# Altium PCB nrf24l01_cell(P40).PcbDoc (part 5 of 11)
Units mm, origin at the board's own origin, x right, y up, seen from the top; angles counter-clockwise.
Board outline 136.2 x 112.2 mm, 2 copper layers (TopLayer, BottomLayer); 520 components, 0 nets, 2804 pads, 1040 vias.
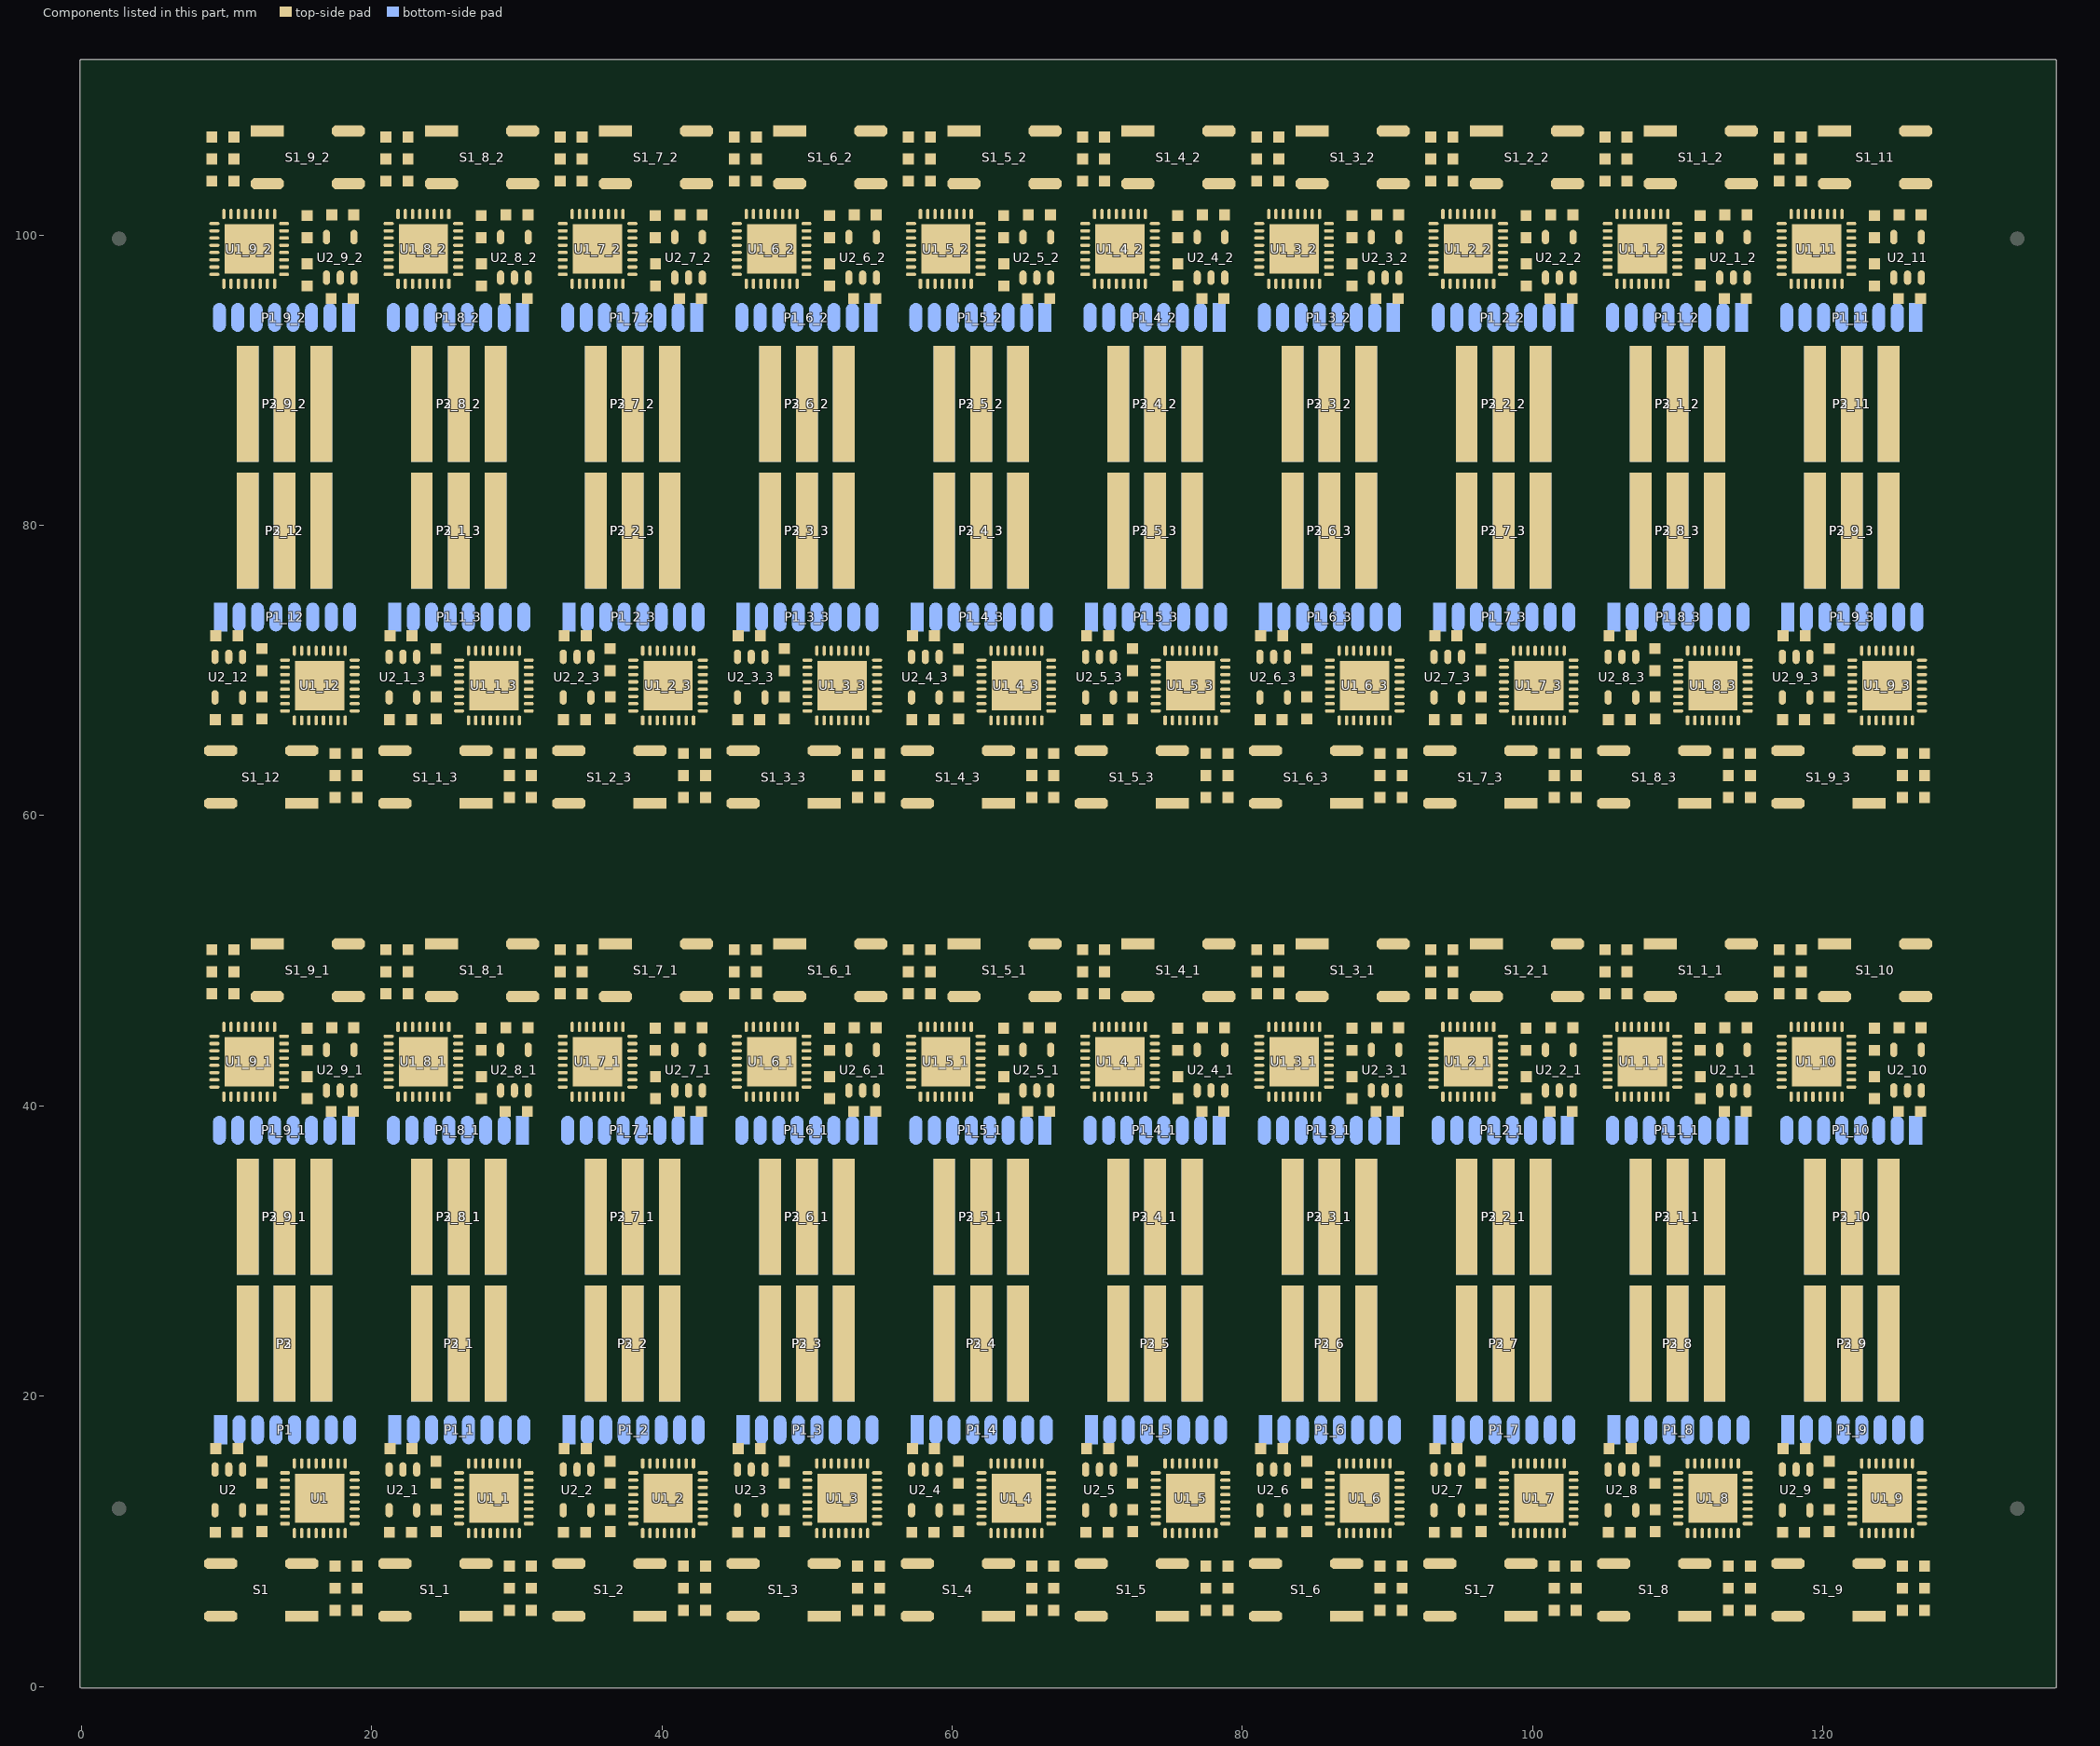
[diagram p5: the components of this part, seen from the top]

## Via types
v1: diameter 0.4, hole 0.2, TopLayer to BottomLayer, tented both sides, 1040 vias

## Nets (pads, with @x,y where several pads share a name; then routed paths per layer and width w, separated by ;. In a path a pad name is that pad's centre, name@x,y a point inside that pad or via, vN(x,y) a via of type N, cw(c..) or ccw(c..) an arc to the next point about the centre after c; other vN are vias at no path point) (continued)
copper on no net: (continued)
  TopLayer w0.203: v1@74.68,97.99 cw(c74.512,97.822) 74.75,97.822 cw(c74.988,97.822) v1@74.82,97.99 ; v1(74.69,17.52) 75.16,17.52 75.665,17.015 76.68,16 76.68,15.36 ; v1(74.69,73.52) 75.16,73.52 75.665,73.015 76.68,72 76.68,71.36 ; v1@74.74,43.51 74.74,44.41 74.89,44.56 76.89,44.56 ; 74.74,43.723 ccw(c74.943,43.723) v1@74.8,43.58 ; v1@74.74,99.51 74.74,100.41 74.89,100.56 76.89,100.56 ; 74.74,99.723 ccw(c74.943,99.723) v1@74.8,99.58 ; v1@74.76,17.45 cw(c74.928,17.282) 74.928,17.52 cw(c74.928,17.758) v1@74.76,17.59 ; v1@74.76,73.45 cw(c74.928,73.282) 74.928,73.52 cw(c74.928,73.758) v1@74.76,73.59 ; 74.864,36.675 cw(c74.864,36.284) v1@75.14,36.56 ; 74.864,92.675 cw(c74.864,92.284) v1@75.14,92.56 ; 74.912,39.942 cw(c75.56,39.295) 75.56,40.211 ; 74.912,95.942 cw(c75.56,95.295) 75.56,96.211 ; 75.029,15.927 cw(c74.698,15.595) 75.167,15.595 ; 75.029,71.927 cw(c74.698,71.595) 75.167,71.595 ; 75.154,40.184 ccw(c74.847,40.49) 75.281,40.49 ; 75.154,96.184 ccw(c74.847,96.49) 75.281,96.49 ; 75.356,43.619 cw(c74.91,43.16) 75.55,43.16 ; 75.356,99.619 cw(c74.91,99.16) 75.55,99.16 ; 75.379,8.28 77.486,8.28 ; 75.379,64.28 77.486,64.28 ; 75.55,43.82 75.55,43.16 ; 75.55,99.82 75.55,99.16 ; 75.744,43.619 ccw(c76.19,43.16) 75.55,43.16 ; 75.744,99.619 ccw(c76.19,99.16) 75.55,99.16 ; v1@75.81,37.29 ccw(c75.642,37.122) 75.642,37.36 ccw(c75.642,37.598) v1@75.81,37.43 ; v1@75.81,93.29 ccw(c75.642,93.122) 75.642,93.36 ccw(c75.642,93.598) v1@75.81,93.43 ; v1(75.88,37.36) v1@75.81,37.36 ; v1(75.88,93.36) v1@75.81,93.36 ; v1@75.89,37.28 v1@75.81,37.36 ; v1@75.89,93.28 v1@75.81,93.36 ; v1@75.95,17.422 cw(c75.95,17.184) 76.118,17.352 cw(c76.286,17.52) v1@76.048,17.52 ; v1(75.95,17.52) 77.18,16.29 77.18,15.36 ; v1@75.95,73.422 cw(c75.95,73.184) 76.118,73.352 cw(c76.286,73.52) v1@76.048,73.52 ; v1(75.95,73.52) 77.18,72.29 77.18,71.36 ; 76.006,8.523 ccw(c76.593,9.111) 76.593,8.28 ; 76.006,64.523 ccw(c76.593,65.111) 76.593,64.28 ; 76.15,8.667 ccw(c77.084,9.602) 77.084,8.28 ; 76.15,64.667 ccw(c77.084,65.602) 77.084,64.28 ; 76.54,19.732 cw(c76.54,18.673) 77.288,19.422 ; 76.54,20.17 78.79,17.92 v1(79.45,17.92) ; 76.54,35.3 v1(79.31,38.07) ; 76.54,35.862 ccw(c76.54,37.219) 77.499,36.259 ; 76.54,36.065 ccw(c76.54,37.913) 77.846,36.606 ; 76.54,36.268 ccw(c76.54,38.606) 78.193,36.953 ; v1(76.54,36.86) 77.344,36.86 77.422,36.938 78.734,38.25 78.734,39.62 78.734,41.004 78.79,41.06 78.79,41.84 78.6,42.03 77.06,42.03 76.89,41.86 76.89,41.06 ; 76.54,75.732 cw(c76.54,74.673) 77.288,75.422 ; 76.54,76.17 78.79,73.92 v1(79.45,73.92) ; 76.54,91.3 v1(79.31,94.07) ; 76.54,91.862 ccw(c76.54,93.219) 77.499,92.259 ; 76.54,92.065 ccw(c76.54,93.913) 77.846,92.606 ; 76.54,92.268 ccw(c76.54,94.606) 78.193,92.953 ; v1(76.54,92.86) 77.344,92.86 77.422,92.938 78.734,94.25 78.734,95.62 78.734,97.004 78.79,97.06 78.79,97.84 78.6,98.03 77.06,98.03 76.89,97.86 76.89,97.06 ; v1@76.61,36.79 cw(c76.778,36.622) 76.778,36.86 cw(c76.778,37.098) v1@76.61,36.93 ; v1@76.61,92.79 cw(c76.778,92.622) 76.778,92.86 cw(c76.778,93.098) v1@76.61,92.93 ; 76.782,20.38 ccw(c77.873,20.38) 77.102,19.608 ; 76.782,76.38 ccw(c77.873,76.38) 77.102,75.608 ; 76.785,41.415 ccw(c76.532,41.668) 76.89,41.668 ccw(c77.248,41.668) 76.995,41.415 ; 76.785,44.215 ccw(c76.532,44.468) 76.89,44.468 ccw(c77.248,44.468) 76.995,44.215 ; 76.785,97.415 ccw(c76.532,97.668) 76.89,97.668 ccw(c77.248,97.668) 76.995,97.415 ; 76.785,100.215 ccw(c76.532,100.468) 76.89,100.468 ccw(c77.248,100.468) 76.995,100.215 ; 76.89,43.86 76.89,44.56 ; 76.89,44.484 cw(c77.557,44.484) 77.341,45.116 ; 76.89,44.769 cw(c77.46,44.769) 77.275,45.308 ; 76.89,45.054 cw(c77.362,45.054) 77.209,45.5 ; 76.89,99.86 76.89,100.56 ; 76.89,100.484 cw(c77.557,100.484) 77.341,101.116 ; 76.89,100.769 cw(c77.46,100.769) 77.275,101.308 ; 76.89,101.054 cw(c77.362,101.054) 77.209,101.5 ; 76.985,20.38 ccw(c78.567,20.38) 77.448,19.262 ; 76.985,76.38 ccw(c78.567,76.38) 77.448,75.262 ; v1@77.042,37.37 ccw(c76.804,37.37) 76.972,37.538 ccw(c77.14,37.706) v1@77.14,37.468 ; v1@77.042,93.37 ccw(c76.804,93.37) 76.972,93.538 ccw(c77.14,93.706) v1@77.14,93.468 ; 77.188,20.38 ccw(c79.261,20.38) 77.795,18.915 ; 77.188,35.62 cw(c77.981,35.62) 77.421,36.181 ; 77.188,76.38 ccw(c79.261,76.38) 77.795,74.915 ; 77.188,91.62 cw(c77.981,91.62) 77.421,92.181 ; 77.25,45.38 76.89,45.02 76.89,44.56 ; 77.25,101.38 76.89,101.02 76.89,100.56 ; 77.288,8.082 ccw(c76.811,7.605) 76.811,8.28 ccw(c76.811,8.955) 77.288,8.478 ; 77.288,64.082 ccw(c76.811,63.605) 76.811,64.28 ccw(c76.811,64.955) 77.288,64.478 ; 77.49,6.76 78.21,7.48 78.21,9.16 77.68,9.69 77.68,10.56 ; 77.49,7.039 ccw(c77.49,7.714) 77.967,7.237 ccw(c78.444,6.76) 77.769,6.76 ; 77.49,62.76 78.21,63.48 78.21,65.16 77.68,65.69 77.68,66.56 ; 77.49,63.039 ccw(c77.49,63.714) 77.967,63.237 ccw(c78.444,62.76) 77.769,62.76 ; 78.18,15.36 78.18,16.579 76.311,18.447 72.91,18.447 72.717,18.64 v1@72.19,18.64 ; 78.18,71.36 78.18,72.579 76.311,74.447 72.91,74.447 72.717,74.64 v1@72.19,74.64 ; 78.536,39.422 cw(c78.059,38.945) 78.734,38.945 cw(c79.409,38.945) 78.932,39.422 ; 78.536,39.818 ccw(c78.059,40.295) 78.734,40.295 ccw(c79.409,40.295) 78.932,39.818 ; 78.536,95.422 cw(c78.059,94.945) 78.734,94.945 cw(c79.409,94.945) 78.932,95.422 ; 78.536,95.818 ccw(c78.059,96.295) 78.734,96.295 ccw(c79.409,96.295) 78.932,95.818 ; 78.685,41.415 ccw(c78.432,41.668) 78.79,41.668 ccw(c79.148,41.668) 78.895,41.415 ; 78.685,97.415 ccw(c78.432,97.668) 78.79,97.668 ccw(c79.148,97.668) 78.895,97.415 ; 78.734,40.317 cw(c79.283,40.317) 78.895,40.705 ; 78.734,96.317 cw(c79.283,96.317) 78.895,96.705 ; 78.812,8.478 ccw(c78.335,8.955) 79.01,8.955 ccw(c79.685,8.955) 79.208,8.478 ; 78.812,64.478 ccw(c78.335,64.955) 79.01,64.955 ccw(c79.685,64.955) 79.208,64.478 ; 78.83,11.21 78.83,10.52 79.01,10.34 79.01,8.28 ; 78.83,12.21 v1(79.45,12.21) v1@79.52,12.21 ; 78.83,67.21 78.83,66.52 79.01,66.34 79.01,64.28 ; 78.83,68.21 v1(79.45,68.21) v1@79.52,68.21 ; v1@78.92,9.72 cw(c78.704,9.504) 79.01,9.504 ; v1@78.92,9.86 ccw(c78.704,10.076) 79.01,10.076 ; v1@78.92,65.72 cw(c78.704,65.504) 79.01,65.504 ; v1@78.92,65.86 ccw(c78.704,66.076) 79.01,66.076 ; v1@79.212,38.07 cw(c78.974,38.07) 79.142,37.902 cw(c79.31,37.734) v1@79.31,37.972 ; v1@79.212,94.07 cw(c78.974,94.07) 79.142,93.902 cw(c79.31,93.734) v1@79.31,93.972 ; v1@79.38,12.14 ccw(c79.212,11.972) 79.212,12.21 ccw(c79.212,12.448) v1@79.38,12.28 ; v1@79.38,17.85 ccw(c79.212,17.682) 79.212,17.92 ccw(c79.212,18.158) v1@79.38,17.99 ; v1@79.38,68.14 ccw(c79.212,67.972) 79.212,68.21 ccw(c79.212,68.448) v1@79.38,68.28 ; v1@79.38,73.85 ccw(c79.212,73.682) 79.212,73.92 ccw(c79.212,74.158) v1@79.38,73.99 ; v1@80.48,43.79 v1(80.55,43.79) 81.17,43.79 ; v1@80.48,99.79 v1(80.55,99.79) 81.17,99.79 ; v1(80.55,38.08) 81.21,38.08 83.46,35.83 ; v1(80.55,94.08) 81.21,94.08 83.46,91.83 ; v1@80.62,38.01 cw(c80.788,37.842) 80.788,38.08 cw(c80.788,38.318) v1@80.62,38.15 ; v1@80.62,43.72 cw(c80.788,43.552) 80.788,43.79 cw(c80.788,44.028) v1@80.62,43.86 ; v1@80.62,94.01 cw(c80.788,93.842) 80.788,94.08 cw(c80.788,94.318) v1@80.62,94.15 ; v1@80.62,99.72 cw(c80.788,99.552) 80.788,99.79 cw(c80.788,100.028) v1@80.62,99.86 ; v1(80.69,17.93) 83.46,20.7 ; v1@80.69,18.028 ccw(c80.69,18.266) 80.858,18.098 ccw(c81.026,17.93) v1@80.788,17.93 ; v1(80.69,73.93) 83.46,76.7 ; v1@80.69,74.028 ccw(c80.69,74.266) 80.858,74.098 ccw(c81.026,73.93) v1@80.788,73.93 ; 80.792,47.522 cw(c80.315,47.045) 80.99,47.045 cw(c81.665,47.045) 81.188,47.522 ; 80.792,103.522 cw(c80.315,103.045) 80.99,103.045 cw(c81.665,103.045) 81.188,103.522 ; 80.99,45.924 cw(c81.296,45.924) v1@81.08,46.14 ; 80.99,46.496 ccw(c81.296,46.496) v1@81.08,46.28 ; 80.99,47.72 80.99,45.66 81.17,45.48 81.17,44.79 ; 80.99,101.924 cw(c81.296,101.924) v1@81.08,102.14 ; 80.99,102.496 ccw(c81.296,102.496) v1@81.08,102.28 ; 80.99,103.72 80.99,101.66 81.17,101.48 81.17,100.79 ; 81.068,16.182 cw(c80.591,15.705) 81.266,15.705 cw(c81.941,15.705) 81.464,16.182 ; 81.068,16.578 ccw(c80.591,17.055) 81.266,17.055 ccw(c81.941,17.055) 81.464,16.578 ; 81.068,72.182 cw(c80.591,71.705) 81.266,71.705 cw(c81.941,71.705) 81.464,72.182 ; 81.068,72.578 ccw(c80.591,73.055) 81.266,73.055 ccw(c81.941,73.055) 81.464,72.578 ; 81.105,14.585 cw(c80.852,14.332) 81.21,14.332 cw(c81.568,14.332) 81.315,14.585 ; 81.105,15.295 ccw(c80.717,15.683) 81.266,15.683 ; 81.105,70.585 cw(c80.852,70.332) 81.21,70.332 cw(c81.568,70.332) 81.315,70.585 ; 81.105,71.295 ccw(c80.717,71.683) 81.266,71.683 ; 81.17,41.29 81.17,39.497 83.52,37.146 84.488,37.146 84.96,36.675 87.165,36.675 v1(87.21,36.63) ; 81.17,41.79 80.69,41.79 80.48,41.58 80.48,39.612 83.352,36.74 84.32,36.74 86,35.06 86,32.37 ; 81.17,97.29 81.17,95.497 83.52,93.146 84.488,93.146 84.96,92.675 87.165,92.675 v1(87.21,92.63) ; 81.17,97.79 80.69,97.79 80.48,97.58 80.48,95.612 83.352,92.74 84.32,92.74 86,91.06 86,88.37 ; 81.807,19.047 cw(c83.46,17.394) 83.46,19.732 ; 81.807,75.047 cw(c83.46,73.394) 83.46,75.732 ; 81.82,40.64 81.82,39.421 83.689,37.553 87.09,37.553 87.283,37.36 v1@87.81,37.36 ; 81.82,96.64 81.82,95.421 83.689,93.553 87.09,93.553 87.283,93.36 v1@87.81,93.36 ; 82.154,19.394 cw(c83.46,18.087) 83.46,19.935 ; 82.154,75.394 cw(c83.46,74.087) 83.46,75.935 ; 82.205,37.085 cw(c80.739,35.62) 82.812,35.62 ; 82.205,93.085 cw(c80.739,91.62) 82.812,91.62 ; 82.231,49.24 cw(c81.556,49.24) 82.033,48.763 cw(c82.51,48.286) 82.51,48.961 ; 82.231,105.24 cw(c81.556,105.24) 82.033,104.763 cw(c82.51,104.286) 82.51,104.961 ; 82.32,40.64 82.32,39.496 83.841,37.975 85.995,37.975 86.08,38.06 v1(86.57,38.06) ; 82.32,45.44 82.32,46.31 81.79,46.84 81.79,48.52 82.51,49.24 ; 82.32,96.64 82.32,95.496 83.841,93.975 85.995,93.975 86.08,94.06 v1(86.57,94.06) ; 82.32,101.44 82.32,102.31 81.79,102.84 81.79,104.52 82.51,105.24 ; 82.501,19.741 cw(c83.46,18.781) 83.46,20.138 ; 82.501,75.741 cw(c83.46,74.781) 83.46,76.138 ; 82.514,47.72 84.62,47.72 ; 82.514,103.72 84.62,103.72 ; 82.552,36.738 cw(c81.433,35.62) 83.015,35.62 ; 82.552,92.738 cw(c81.433,91.62) 83.015,91.62 ; 82.579,19.819 ccw(c82.019,20.38) 82.812,20.38 ; 82.579,75.819 ccw(c82.019,76.38) 82.812,76.38 ; 82.659,10.884 ccw(c82.443,11.516) 83.11,11.516 ; 82.659,66.884 ccw(c82.443,67.516) 83.11,67.516 ; 82.712,36.578 ccw(c83.46,37.327) 83.46,36.268 ; 82.712,47.522 cw(c83.189,47.045) 83.189,47.72 cw(c83.189,48.395) 82.712,47.918 ; 82.712,92.578 ccw(c83.46,93.327) 83.46,92.268 ; 82.712,103.522 cw(c83.189,103.045) 83.189,103.72 cw(c83.189,104.395) 82.712,103.918 ; 82.725,10.692 ccw(c82.54,11.231) 83.11,11.231 ; 82.725,66.692 ccw(c82.54,67.231) 83.11,67.231 ; 82.75,10.62 83.11,10.98 83.11,11.44 ; 82.75,66.62 83.11,66.98 83.11,67.44 ; 82.791,10.5 ccw(c82.638,10.946) 83.11,10.946 ; 82.791,66.5 ccw(c82.638,66.946) 83.11,66.946 ; 82.82,40.64 82.82,39.71 v1(84.05,38.48) ; 82.82,96.64 82.82,95.71 v1(84.05,94.48) ; v1@82.86,18.532 cw(c82.86,18.294) 83.028,18.462 cw(c83.196,18.63) v1@82.958,18.63 ; v1(82.86,18.63) 84.07,17.42 86.076,17.42 86.481,17.015 87.09,17.015 88.18,15.925 88.18,15.36 ; v1@82.86,74.532 cw(c82.86,74.294) 83.028,74.462 cw(c83.196,74.63) v1@82.958,74.63 ; v1(82.86,74.63) 84.07,73.42 86.076,73.42 86.481,73.015 87.09,73.015 88.18,71.925 88.18,71.36 ; 82.898,36.392 cw(c82.127,35.62) 83.218,35.62 ; 82.898,92.392 cw(c82.127,91.62) 83.218,91.62 ; 82.916,47.72 cw(c82.916,46.398) 83.85,47.333 ; 82.916,103.72 cw(c82.916,102.398) 83.85,103.333 ; 83.005,11.785 cw(c82.752,11.532) 83.11,11.532 cw(c83.468,11.532) 83.215,11.785 ; 83.005,14.585 cw(c82.752,14.332) 83.11,14.332 cw(c83.468,14.332) 83.215,14.585 ; 83.005,67.785 cw(c82.752,67.532) 83.11,67.532 cw(c83.468,67.532) 83.215,67.785 ; 83.005,70.585 cw(c82.752,70.332) 83.11,70.332 cw(c83.468,70.332) 83.215,70.585 ; 83.11,12.14 83.11,11.44 ; 83.11,14.94 83.11,14.14 82.94,13.97 81.4,13.97 81.21,14.16 81.21,14.94 81.266,14.996 81.266,16.38 81.266,17.75 82.578,19.062 82.656,19.14 v1(83.46,19.14) ; 83.11,68.14 83.11,67.44 ; 83.11,70.94 83.11,70.14 82.94,69.97 81.4,69.97 81.21,70.16 81.21,70.94 81.266,70.996 81.266,72.38 81.266,73.75 82.578,75.062 82.656,75.14 v1(83.46,75.14) ; 83.32,40.64 83.32,40 84.335,38.985 84.84,38.48 v1(85.31,38.48) ; 83.32,96.64 83.32,96 84.335,94.985 84.84,94.48 v1(85.31,94.48) ; v1@83.39,19.07 ccw(c83.222,18.902) 83.222,19.14 ccw(c83.222,19.378) v1@83.39,19.21 ; v1@83.39,75.07 ccw(c83.222,74.902) 83.222,75.14 ccw(c83.222,75.378) v1@83.39,75.21 ; 83.407,47.72 cw(c83.407,46.889) 83.994,47.477 ; 83.407,103.72 cw(c83.407,102.889) 83.994,103.477 ; 83.82,40.64 83.82,40.075 84.91,38.985 85.519,38.985 85.924,38.58 87.93,38.58 v1(89.14,37.37) ; 83.82,96.64 83.82,96.075 84.91,94.985 85.519,94.985 85.924,94.58 87.93,94.58 v1(89.14,93.37) ; v1@83.952,38.48 ccw(c83.714,38.48) 83.882,38.648 ccw(c84.05,38.816) v1@84.05,38.578 ; v1@83.952,94.48 ccw(c83.714,94.48) 83.882,94.648 ccw(c84.05,94.816) v1@84.05,94.578 ; v1@84.11,18.72 v1@84.19,18.64 ; v1@84.11,74.72 v1@84.19,74.64 ; v1(84.12,18.64) v1@84.19,18.64 ; v1(84.12,74.64) v1@84.19,74.64 ; v1@84.19,18.57 cw(c84.358,18.402) 84.358,18.64 cw(c84.358,18.878) v1@84.19,18.71 ; v1@84.19,74.57 cw(c84.358,74.402) 84.358,74.64 cw(c84.358,74.878) v1@84.19,74.71 ; 84.256,12.381 ccw(c83.81,12.84) 84.45,12.84 ; 84.256,68.381 ccw(c83.81,68.84) 84.45,68.84 ; 84.44,15.41 85.2,16.17 86.786,16.17 87.18,15.776 87.18,15.36 ; 84.44,15.789 ccw(c84.44,16.705) 85.088,16.058 ; 84.44,71.41 85.2,72.17 86.786,72.17 87.18,71.776 87.18,71.36 ; 84.44,71.789 ccw(c84.44,72.705) 85.088,72.058 ; 84.45,12.18 84.45,12.84 ; 84.45,68.18 84.45,68.84 ; 84.644,12.381 cw(c85.09,12.84) 84.45,12.84 ; 84.644,68.381 cw(c85.09,68.84) 84.45,68.84 ; 84.719,15.51 cw(c85.153,15.51) 84.846,15.816 ; 84.719,71.51 cw(c85.152,71.51) 84.846,71.816 ; v1(84.79,19.37) 84.835,19.325 87.04,19.325 87.512,18.854 88.48,18.854 90.83,16.503 90.83,14.71 ; v1(84.79,75.37) 84.835,75.325 87.04,75.325 87.512,74.854 88.48,74.854 90.83,72.503 90.83,70.71 ; 84.82,40.64 84.82,40.224 85.214,39.83 86.8,39.83 87.56,40.59 ; 84.82,96.64 84.82,96.224 85.214,95.83 86.8,95.83 87.56,96.59 ; 84.833,40.405 ccw(c85.302,40.405) 84.971,40.073 ; 84.833,96.405 ccw(c85.302,96.405) 84.971,96.073 ; v1@84.86,19.44 ccw(c85.136,19.716) 85.136,19.325 ; v1@84.86,75.44 ccw(c85.136,75.716) 85.136,75.325 ; v1@85.18,14.01 ccw(c85.012,14.178) 85.25,14.178 ccw(c85.488,14.178) v1@85.32,14.01 ; v1@85.18,70.01 ccw(c85.012,70.178) 85.25,70.178 ccw(c85.488,70.178) v1@85.32,70.01 ; v1@85.195,12.564 cw(c85.545,12.219) 85.545,12.71 ; v1@85.195,68.564 cw(c85.545,68.219) 85.545,68.71 ; v1@85.2,12.42 cw(c85.057,12.277) 85.26,12.277 ; v1@85.2,68.42 cw(c85.057,68.277) 85.26,68.277 ; v1@85.24,38.41 ccw(c85.072,38.242) 85.072,38.48 ccw(c85.072,38.718) v1@85.24,38.55 ; v1@85.24,94.41 ccw(c85.072,94.242) 85.072,94.48 ccw(c85.072,94.718) v1@85.24,94.55 ; v1(85.25,13.94) 85.25,14.55 85.41,14.71 86.03,14.71 ; v1(85.25,69.94) 85.25,70.55 85.41,70.71 86.03,70.71 ; 85.26,12.228 cw(c85.532,12.228) v1@85.34,12.42 ; v1@85.26,12.49 85.26,11.59 85.11,11.44 83.11,11.44 ; v1@85.26,12.53 85.44,12.71 86.03,12.71 ccw(c86.03,11.742) v1@85.34,12.421 ; 85.26,68.228 cw(c85.532,68.228) 85.34,68.42 cw(c86.03,67.742) 86.03,68.71 85.44,68.71 v1@85.26,68.53 ; v1@85.26,68.49 85.26,67.59 85.11,67.44 83.11,67.44 ; v1@85.366,12.512 cw(c85.545,12.555) 85.415,12.685 ; v1@85.366,68.512 cw(c85.545,68.555) 85.415,68.685 ; v1(85.43,17.94) 85.92,17.94 86.005,18.025 88.159,18.025 89.68,16.504 89.68,15.36 ; v1(85.43,73.94) 85.92,73.94 86.005,74.025 88.159,74.025 89.68,72.504 89.68,71.36 ; v1@85.5,17.87 cw(c85.668,17.702) 85.668,17.94 cw(c85.668,18.178) v1@85.5,18.01 ; v1@85.5,73.87 cw(c85.668,73.702) 85.668,73.94 cw(c85.668,74.178) v1@85.5,74.01 ; v1@85.9,45.21 cw(c85.732,45.042) 85.97,45.042 cw(c86.208,45.042) v1@86.04,45.21 ; v1@85.9,101.21 cw(c85.732,101.042) 85.97,101.042 cw(c86.208,101.042) v1@86.04,101.21 ; v1@85.96,10.79 ccw(c85.792,10.958) 86.03,10.958 ccw(c86.268,10.958) v1@86.1,10.79 ; v1@85.96,66.79 ccw(c85.792,66.958) 86.03,66.958 ccw(c86.268,66.958) v1@86.1,66.79 ; 85.97,41.29 86.59,41.29 86.75,41.45 v1(86.75,42.06) ; 85.97,42.79 87.18,42.79 87.55,43.16 ; 85.97,44.79 v1(85.97,45.28) ; 85.97,97.29 86.59,97.29 86.75,97.45 v1(86.75,98.06) ; 85.97,98.79 87.18,98.79 87.55,99.16 ; 85.97,100.79 v1(85.97,101.28) ; 86,23.63 86,20.94 87.68,19.26 88.648,19.26 91.52,16.388 91.52,14.42 91.31,14.21 90.83,14.21 ; 86,79.63 86,76.94 87.68,75.26 88.648,75.26 91.52,72.388 91.52,70.42 91.31,70.21 90.83,70.21 ; v1(86.03,10.72) 86.03,11.21 ; 86.03,13.21 84.82,13.21 84.45,12.84 ; v1(86.03,66.72) 86.03,67.21 ; 86.03,69.21 84.82,69.21 84.45,68.84 ; 86.455,43.29 ccw(c86.455,43.781) v1@86.805,43.436 ; 86.455,99.29 ccw(c86.455,99.781) v1@86.805,99.436 ; v1@86.5,37.99 ccw(c86.332,37.822) 86.332,38.06 ccw(c86.332,38.298) v1@86.5,38.13 ; v1@86.5,93.99 ccw(c86.332,93.822) 86.332,94.06 ccw(c86.332,94.298) v1@86.5,94.13 ; 86.585,43.315 ccw(c86.455,43.445) v1@86.634,43.488 ; 86.585,99.315 ccw(c86.455,99.445) v1@86.634,99.488 ; v1@86.66,43.579 cw(c85.97,44.258) 85.97,43.29 86.56,43.29 v1@86.74,43.47 ; v1@86.66,99.579 cw(c85.97,100.258) 85.97,99.29 86.56,99.29 v1@86.74,99.47 ; v1@86.66,43.58 ccw(c86.468,43.772) 86.74,43.772 ; v1@86.66,99.58 ccw(c86.468,99.772) 86.74,99.772 ; v1@86.68,41.99 cw(c86.512,41.822) 86.75,41.822 cw(c86.988,41.822) v1@86.82,41.99 ; v1@86.68,97.99 cw(c86.512,97.822) 86.75,97.822 cw(c86.988,97.822) v1@86.82,97.99 ; v1(86.69,17.52) 87.16,17.52 87.665,17.015 88.68,16 88.68,15.36 ; v1(86.69,73.52) 87.16,73.52 87.665,73.015 88.68,72 88.68,71.36 ; v1@86.74,43.51 86.74,44.41 86.89,44.56 88.89,44.56 ; 86.74,43.723 ccw(c86.943,43.723) v1@86.8,43.58 ; v1@86.74,99.51 86.74,100.41 86.89,100.56 88.89,100.56 ; 86.74,99.723 ccw(c86.943,99.723) v1@86.8,99.58 ; v1@86.76,17.45 cw(c86.928,17.282) 86.928,17.52 cw(c86.928,17.758) v1@86.76,17.59 ; v1@86.76,73.45 cw(c86.928,73.282) 86.928,73.52 cw(c86.928,73.758) v1@86.76,73.59 ; 86.864,36.675 cw(c86.864,36.284) v1@87.14,36.56 ; 86.864,92.675 cw(c86.864,92.284) v1@87.14,92.56 ; 86.912,39.942 cw(c87.56,39.295) 87.56,40.211 ; 86.912,95.942 cw(c87.56,95.295) 87.56,96.211 ; 87.029,15.927 cw(c86.698,15.595) 87.167,15.595 ; 87.029,71.927 cw(c86.698,71.595) 87.167,71.595 ; 87.154,40.184 ccw(c86.847,40.49) 87.281,40.49 ; 87.154,96.184 ccw(c86.847,96.49) 87.281,96.49 ; 87.356,43.619 cw(c86.91,43.16) 87.55,43.16 ; 87.356,99.619 cw(c86.91,99.16) 87.55,99.16 ; 87.379,8.28 89.486,8.28 ; 87.379,64.28 89.486,64.28 ; 87.55,43.82 87.55,43.16 ; 87.55,99.82 87.55,99.16 ; 87.744,43.619 ccw(c88.19,43.16) 87.55,43.16 ; 87.744,99.619 ccw(c88.19,99.16) 87.55,99.16 ; v1@87.81,37.29 ccw(c87.642,37.122) 87.642,37.36 ccw(c87.642,37.598) v1@87.81,37.43 ; v1@87.81,93.29 ccw(c87.642,93.122) 87.642,93.36 ccw(c87.642,93.598) v1@87.81,93.43 ; v1(87.88,37.36) v1@87.81,37.36 ; v1(87.88,93.36) v1@87.81,93.36 ; v1@87.89,37.28 v1@87.81,37.36 ; v1@87.89,93.28 v1@87.81,93.36 ; v1@87.95,17.422 cw(c87.95,17.184) 88.118,17.352 cw(c88.286,17.52) v1@88.048,17.52 ; v1(87.95,17.52) 89.18,16.29 89.18,15.36 ; v1@87.95,73.422 cw(c87.95,73.184) 88.118,73.352 cw(c88.286,73.52) v1@88.048,73.52 ; v1(87.95,73.52) 89.18,72.29 89.18,71.36 ; 88.006,8.523 ccw(c88.593,9.111) 88.593,8.28 ; 88.006,64.523 ccw(c88.593,65.111) 88.593,64.28 ; 88.15,8.667 ccw(c89.084,9.602) 89.084,8.28 ; 88.15,64.667 ccw(c89.084,65.602) 89.084,64.28 ; 88.54,19.732 cw(c88.54,18.673) 89.288,19.422 ; 88.54,20.17 90.79,17.92 v1(91.45,17.92) ; 88.54,35.3 v1(91.31,38.07) ; 88.54,35.862 ccw(c88.54,37.219) 89.499,36.259 ; 88.54,36.065 ccw(c88.54,37.913) 89.846,36.606 ; 88.54,36.268 ccw(c88.54,38.606) 90.193,36.953 ; v1(88.54,36.86) 89.344,36.86 89.422,36.938 90.734,38.25 90.734,39.62 90.734,41.004 90.79,41.06 90.79,41.84 90.6,42.03 89.06,42.03 88.89,41.86 88.89,41.06 ; 88.54,75.732 cw(c88.54,74.673) 89.288,75.422 ; 88.54,76.17 90.79,73.92 v1(91.45,73.92) ; 88.54,91.3 v1(91.31,94.07) ; 88.54,91.862 ccw(c88.54,93.219) 89.499,92.259 ; 88.54,92.065 ccw(c88.54,93.913) 89.846,92.606 ; 88.54,92.268 ccw(c88.54,94.606) 90.193,92.953 ; v1(88.54,92.86) 89.344,92.86 89.422,92.938 90.734,94.25 90.734,95.62 90.734,97.004 90.79,97.06 90.79,97.84 90.6,98.03 89.06,98.03 88.89,97.86 88.89,97.06 ; v1@88.61,36.79 cw(c88.778,36.622) 88.778,36.86 cw(c88.778,37.098) v1@88.61,36.93 ; v1@88.61,92.79 cw(c88.778,92.622) 88.778,92.86 cw(c88.778,93.098) v1@88.61,92.93 ; 88.782,20.38 ccw(c89.873,20.38) 89.102,19.608 ; 88.782,76.38 ccw(c89.873,76.38) 89.102,75.608 ; 88.785,41.415 ccw(c88.532,41.668) 88.89,41.668 ccw(c89.248,41.668) 88.995,41.415 ; 88.785,44.215 ccw(c88.532,44.468) 88.89,44.468 ccw(c89.248,44.468) 88.995,44.215 ; 88.785,97.415 ccw(c88.532,97.668) 88.89,97.668 ccw(c89.248,97.668) 88.995,97.415 ; 88.785,100.215 ccw(c88.532,100.468) 88.89,100.468 ccw(c89.248,100.468) 88.995,100.215 ; 88.89,43.86 88.89,44.56 ; 88.89,44.484 cw(c89.557,44.484) 89.341,45.116 ; 88.89,44.769 cw(c89.46,44.769) 89.275,45.308 ; 88.89,45.054 cw(c89.362,45.054) 89.209,45.5 ; 88.89,99.86 88.89,100.56 ; 88.89,100.484 cw(c89.557,100.484) 89.341,101.116 ; 88.89,100.769 cw(c89.46,100.769) 89.275,101.308 ; 88.89,101.054 cw(c89.362,101.054) 89.209,101.5 ; 88.985,20.38 ccw(c90.567,20.38) 89.448,19.262 ; 88.985,76.38 ccw(c90.567,76.38) 89.448,75.262 ; v1@89.042,37.37 ccw(c88.804,37.37) 88.972,37.538 ccw(c89.14,37.706) v1@89.14,37.468 ; v1@89.042,93.37 ccw(c88.804,93.37) 88.972,93.538 ccw(c89.14,93.706) v1@89.14,93.468 ; 89.188,20.38 ccw(c91.261,20.38) 89.795,18.915 ; 89.188,35.62 cw(c89.981,35.62) 89.421,36.181 ; 89.188,76.38 ccw(c91.261,76.38) 89.795,74.915 ; 89.188,91.62 cw(c89.981,91.62) 89.421,92.181 ; 89.25,45.38 88.89,45.02 88.89,44.56 ; 89.25,101.38 88.89,101.02 88.89,100.56 ; 89.288,8.082 ccw(c88.811,7.605) 88.811,8.28 ccw(c88.811,8.955) 89.288,8.478 ; 89.288,64.082 ccw(c88.811,63.605) 88.811,64.28 ccw(c88.811,64.955) 89.288,64.478 ; 89.49,6.76 90.21,7.48 90.21,9.16 89.68,9.69 89.68,10.56 ; 89.49,7.039 ccw(c89.49,7.714) 89.967,7.237 ccw(c90.444,6.76) 89.769,6.76 ; 89.49,62.76 90.21,63.48 90.21,65.16 89.68,65.69 89.68,66.56 ; 89.49,63.039 ccw(c89.49,63.714) 89.967,63.237 ccw(c90.444,62.76) 89.769,62.76 ; 90.18,15.36 90.18,16.579 88.311,18.447 84.91,18.447 84.717,18.64 v1@84.19,18.64 ; 90.18,71.36 90.18,72.579 88.311,74.447 84.91,74.447 84.717,74.64 v1@84.19,74.64 ; 90.536,39.422 cw(c90.059,38.945) 90.734,38.945 cw(c91.409,38.945) 90.932,39.422 ; 90.536,39.818 ccw(c90.059,40.295) 90.734,40.295 ccw(c91.409,40.295) 90.932,39.818 ; 90.536,95.422 cw(c90.059,94.945) 90.734,94.945 cw(c91.409,94.945) 90.932,95.422 ; 90.536,95.818 ccw(c90.059,96.295) 90.734,96.295 ccw(c91.409,96.295) 90.932,95.818 ; 90.685,41.415 ccw(c90.432,41.668) 90.79,41.668 ccw(c91.148,41.668) 90.895,41.415 ; 90.685,97.415 ccw(c90.432,97.668) 90.79,97.668 ccw(c91.148,97.668) 90.895,97.415 ; 90.734,40.317 cw(c91.283,40.317) 90.895,40.705 ; 90.734,96.317 cw(c91.283,96.317) 90.895,96.705 ; 90.812,8.478 ccw(c90.335,8.955) 91.01,8.955 ccw(c91.685,8.955) 91.208,8.478 ; 90.812,64.478 ccw(c90.335,64.955) 91.01,64.955 ccw(c91.685,64.955) 91.208,64.478 ; 90.83,11.21 90.83,10.52 91.01,10.34 91.01,8.28 ; 90.83,12.21 v1(91.45,12.21) v1@91.52,12.21 ; 90.83,67.21 90.83,66.52 91.01,66.34 91.01,64.28 ; 90.83,68.21 v1(91.45,68.21) v1@91.52,68.21 ; v1@90.92,9.72 cw(c90.704,9.504) 91.01,9.504 ; v1@90.92,9.86 ccw(c90.704,10.076) 91.01,10.076 ; v1@90.92,65.72 cw(c90.704,65.504) 91.01,65.504 ; v1@90.92,65.86 ccw(c90.704,66.076) 91.01,66.076 ; v1@91.212,38.07 cw(c90.974,38.07) 91.142,37.902 cw(c91.31,37.734) v1@91.31,37.972 ; v1@91.212,94.07 cw(c90.974,94.07) 91.142,93.902 cw(c91.31,93.734) v1@91.31,93.972 ; v1@91.38,12.14 ccw(c91.212,11.972) 91.212,12.21 ccw(c91.212,12.448) v1@91.38,12.28 ; v1@91.38,17.85 ccw(c91.212,17.682) 91.212,17.92 ccw(c91.212,18.158) v1@91.38,17.99 ; v1@91.38,68.14 ccw(c91.212,67.972) 91.212,68.21 ccw(c91.212,68.448) v1@91.38,68.28 ; v1@91.38,73.85 ccw(c91.212,73.682) 91.212,73.92 ccw(c91.212,74.158) v1@91.38,73.99 ; v1@92.48,43.79 v1(92.55,43.79) 93.17,43.79 ; v1@92.48,99.79 v1(92.55,99.79) 93.17,99.79 ; v1(92.55,38.08) 93.21,38.08 95.46,35.83 ; v1(92.55,94.08) 93.21,94.08 95.46,91.83 ; v1@92.62,38.01 cw(c92.788,37.842) 92.788,38.08 cw(c92.788,38.318) v1@92.62,38.15 ; v1@92.62,43.72 cw(c92.788,43.552) 92.788,43.79 cw(c92.788,44.028) v1@92.62,43.86 ; v1@92.62,94.01 cw(c92.788,93.842) 92.788,94.08 cw(c92.788,94.318) v1@92.62,94.15 ; v1@92.62,99.72 cw(c92.788,99.552) 92.788,99.79 cw(c92.788,100.028) v1@92.62,99.86 ; v1(92.69,17.93) 95.46,20.7 ; v1@92.69,18.028 ccw(c92.69,18.266) 92.858,18.098 ccw(c93.026,17.93) v1@92.788,17.93 ; v1(92.69,73.93) 95.46,76.7 ; v1@92.69,74.028 ccw(c92.69,74.266) 92.858,74.098 ccw(c93.026,73.93) v1@92.788,73.93 ; 92.792,47.522 cw(c92.315,47.045) 92.99,47.045 cw(c93.665,47.045) 93.188,47.522 ; 92.792,103.522 cw(c92.315,103.045) 92.99,103.045 cw(c93.665,103.045) 93.188,103.522 ; 92.99,45.924 cw(c93.296,45.924) v1@93.08,46.14 ; 92.99,46.496 ccw(c93.296,46.496) v1@93.08,46.28 ; 92.99,47.72 92.99,45.66 93.17,45.48 93.17,44.79 ; 92.99,101.924 cw(c93.296,101.924) v1@93.08,102.14 ; 92.99,102.496 ccw(c93.296,102.496) v1@93.08,102.28 ; 92.99,103.72 92.99,101.66 93.17,101.48 93.17,100.79 ; 93.068,16.182 cw(c92.591,15.705) 93.266,15.705 cw(c93.941,15.705) 93.464,16.182 ; 93.068,16.578 ccw(c92.591,17.055) 93.266,17.055 ccw(c93.941,17.055) 93.464,16.578 ; 93.068,72.182 cw(c92.591,71.705) 93.266,71.705 cw(c93.941,71.705) 93.464,72.182 ; 93.068,72.578 ccw(c92.591,73.055) 93.266,73.055 ccw(c93.941,73.055) 93.464,72.578 ; 93.105,14.585 cw(c92.852,14.332) 93.21,14.332 cw(c93.568,14.332) 93.315,14.585 ; 93.105,15.295 ccw(c92.717,15.683) 93.266,15.683 ; 93.105,70.585 cw(c92.852,70.332) 93.21,70.332 cw(c93.568,70.332) 93.315,70.585 ; 93.105,71.295 ccw(c92.717,71.683) 93.266,71.683 ; 93.17,41.29 93.17,39.497 95.52,37.146 96.488,37.146 96.96,36.675 99.165,36.675 v1(99.21,36.63) ; 93.17,41.79 92.69,41.79 92.48,41.58 92.48,39.612 95.352,36.74 96.32,36.74 98,35.06 98,32.37 ; 93.17,97.29 93.17,95.497 95.52,93.146 96.488,93.146 96.96,92.675 99.165,92.675 v1(99.21,92.63) ; 93.17,97.79 92.69,97.79 92.48,97.58 92.48,95.612 95.352,92.74 96.32,92.74 98,91.06 98,88.37 ; 93.807,19.047 cw(c95.46,17.394) 95.46,19.732 ; 93.807,75.047 cw(c95.46,73.394) 95.46,75.732 ; 93.82,40.64 93.82,39.421 95.689,37.553 99.09,37.553 99.283,37.36 v1@99.81,37.36 ; 93.82,96.64 93.82,95.421 95.689,93.553 99.09,93.553 99.283,93.36 v1@99.81,93.36 ; 94.154,19.394 cw(c95.46,18.087) 95.46,19.935 ; 94.154,75.394 cw(c95.46,74.087) 95.46,75.935 ; 94.205,37.085 cw(c92.739,35.62) 94.812,35.62 ; 94.205,93.085 cw(c92.739,91.62) 94.812,91.62 ; 94.231,49.24 cw(c93.556,49.24) 94.033,48.763 cw(c94.51,48.286) 94.51,48.961 ; 94.231,105.24 cw(c93.556,105.24) 94.033,104.763 cw(c94.51,104.286) 94.51,104.961 ; 94.32,40.64 94.32,39.496 95.841,37.975 97.995,37.975 98.08,38.06 v1(98.57,38.06) ; 94.32,45.44 94.32,46.31 93.79,46.84 93.79,48.52 94.51,49.24 ; 94.32,96.64 94.32,95.496 95.841,93.975 97.995,93.975 98.08,94.06 v1(98.57,94.06) ; 94.32,101.44 94.32,102.31 93.79,102.84 93.79,104.52 94.51,105.24 ; 94.501,19.741 cw(c95.46,18.781) 95.46,20.138 ; 94.501,75.741 cw(c95.46,74.781) 95.46,76.138 ; 94.514,47.72 96.62,47.72 ; 94.514,103.72 96.62,103.72 ; 94.552,36.738 cw(c93.433,35.62) 95.015,35.62 ; 94.551,92.738 cw(c93.433,91.62) 95.015,91.62 ; 94.579,19.819 ccw(c94.019,20.38) 94.812,20.38 ; 94.579,75.819 ccw(c94.019,76.38) 94.812,76.38 ; 94.659,10.884 ccw(c94.443,11.516) 95.11,11.516 ; 94.659,66.884 ccw(c94.443,67.516) 95.11,67.516 ; 94.712,36.578 ccw(c95.46,37.327) 95.46,36.268 ; 94.712,47.522 cw(c95.189,47.045) 95.189,47.72 cw(c95.189,48.395) 94.712,47.918 ; 94.712,92.578 ccw(c95.46,93.327) 95.46,92.268 ; 94.712,103.522 cw(c95.189,103.045) 95.189,103.72 cw(c95.189,104.395) 94.712,103.918 ; 94.725,10.692 ccw(c94.54,11.231) 95.11,11.231 ; 94.725,66.692 ccw(c94.54,67.231) 95.11,67.231 ; 94.75,10.62 95.11,10.98 95.11,11.44 ; 94.75,66.62 95.11,66.98 95.11,67.44 ; 94.791,10.5 ccw(c94.638,10.946) 95.11,10.946 ; 94.791,66.5 ccw(c94.638,66.946) 95.11,66.946 ; 94.82,40.64 94.82,39.71 v1(96.05,38.48) ; 94.82,96.64 94.82,95.71 v1(96.05,94.48) ; v1@94.86,18.532 cw(c94.86,18.294) 95.028,18.462 cw(c95.196,18.63) v1@94.958,18.63 ; v1(94.86,18.63) 96.07,17.42 98.076,17.42 98.481,17.015 99.09,17.015 100.18,15.925 100.18,15.36 ; v1@94.86,74.532 cw(c94.86,74.294) 95.028,74.462 cw(c95.196,74.63) v1@94.958,74.63 ; v1(94.86,74.63) 96.07,73.42 98.076,73.42 98.481,73.015 99.09,73.015 100.18,71.925 100.18,71.36 ; 94.898,36.392 cw(c94.127,35.62) 95.218,35.62 ; 94.898,92.392 cw(c94.127,91.62) 95.218,91.62 ; 94.916,47.72 cw(c94.916,46.398) 95.85,47.333 ; 94.916,103.72 cw(c94.916,102.398) 95.85,103.333 ; 95.005,11.785 cw(c94.752,11.532) 95.11,11.532 cw(c95.468,11.532) 95.215,11.785 ; 95.005,14.585 cw(c94.752,14.332) 95.11,14.332 cw(c95.468,14.332) 95.215,14.585 ; 95.005,67.785 cw(c94.752,67.532) 95.11,67.532 cw(c95.468,67.532) 95.215,67.785 ; 95.005,70.585 cw(c94.752,70.332) 95.11,70.332 cw(c95.468,70.332) 95.215,70.585 ; 95.11,12.14 95.11,11.44 ; 95.11,14.94 95.11,14.14 94.94,13.97 93.4,13.97 93.21,14.16 93.21,14.94 93.266,14.996 93.266,16.38 93.266,17.75 94.578,19.062 94.656,19.14 v1(95.46,19.14) ; 95.11,68.14 95.11,67.44 ; 95.11,70.94 95.11,70.14 94.94,69.97 93.4,69.97 93.21,70.16 93.21,70.94 93.266,70.996 93.266,72.38 93.266,73.75 94.578,75.062 94.656,75.14 v1(95.46,75.14) ; 95.32,40.64 95.32,40 96.335,38.985 96.84,38.48 v1(97.31,38.48) ; 95.32,96.64 95.32,96 96.335,94.985 96.84,94.48 v1(97.31,94.48) ; v1@95.39,19.07 ccw(c95.222,18.902) 95.222,19.14 ccw(c95.222,19.378) v1@95.39,19.21 ; v1@95.39,75.07 ccw(c95.222,74.902) 95.222,75.14 ccw(c95.222,75.378) v1@95.39,75.21 ; 95.407,47.72 cw(c95.407,46.889) 95.994,47.477 ; 95.407,103.72 cw(c95.407,102.889) 95.994,103.477 ; 95.82,40.64 95.82,40.075 96.91,38.985 97.519,38.985 97.924,38.58 99.93,38.58 v1(101.14,37.37) ; 95.82,96.64 95.82,96.075 96.91,94.985 97.519,94.985 97.924,94.58 99.93,94.58 v1(101.14,93.37) ; v1@95.952,38.48 ccw(c95.714,38.48) 95.882,38.648 ccw(c96.05,38.816) v1@96.05,38.578 ; v1@95.952,94.48 ccw(c95.714,94.48) 95.882,94.648 ccw(c96.05,94.816) v1@96.05,94.578 ; v1@96.11,18.72 v1@96.19,18.64 ; v1@96.11,74.72 v1@96.19,74.64 ; v1(96.12,18.64) v1@96.19,18.64 ; v1(96.12,74.64) v1@96.19,74.64 ; v1@96.19,18.57 cw(c96.358,18.402) 96.358,18.64 cw(c96.358,18.878) v1@96.19,18.71 ; v1@96.19,74.57 cw(c96.358,74.402) 96.358,74.64 cw(c96.358,74.878) v1@96.19,74.71 ; 96.256,12.381 ccw(c95.81,12.84) 96.45,12.84 ; 96.256,68.381 ccw(c95.81,68.84) 96.45,68.84 ; 96.44,15.41 97.2,16.17 98.786,16.17 99.18,15.776 99.18,15.36 ; 96.44,15.789 ccw(c96.44,16.705) 97.088,16.058 ; 96.44,71.41 97.2,72.17 98.786,72.17 99.18,71.776 99.18,71.36 ; 96.44,71.789 ccw(c96.44,72.705) 97.088,72.058 ; 96.45,12.18 96.45,12.84 ; 96.45,68.18 96.45,68.84 ; 96.644,12.381 cw(c97.09,12.84) 96.45,12.84 ; 96.644,68.381 cw(c97.09,68.84) 96.45,68.84 ; 96.719,15.51 cw(c97.153,15.51) 96.846,15.816 ; 96.719,71.51 cw(c97.152,71.51) 96.846,71.816 ; v1(96.79,19.37) 96.835,19.325 99.04,19.325 99.512,18.854 100.48,18.854 102.83,16.503 102.83,14.71 ; v1(96.79,75.37) 96.835,75.325 99.04,75.325 99.512,74.854 100.48,74.854 102.83,72.503 102.83,70.71 ; 96.82,40.64 96.82,40.224 97.214,39.83 98.8,39.83 99.56,40.59 ; 96.82,96.64 96.82,96.224 97.214,95.83 98.8,95.83 99.56,96.59 ; 96.833,40.405 ccw(c97.302,40.405) 96.971,40.073 ; 96.833,96.405 ccw(c97.302,96.405) 96.971,96.073 ; v1@96.86,19.44 ccw(c97.136,19.716) 97.136,19.325 ; v1@96.86,75.44 ccw(c97.136,75.716) 97.136,75.325 ; v1@97.18,14.01 ccw(c97.012,14.178) 97.25,14.178 ccw(c97.488,14.178) v1@97.32,14.01 ; v1@97.18,70.01 ccw(c97.012,70.178) 97.25,70.178 ccw(c97.488,70.178) v1@97.32,70.01 ; v1@97.195,12.564 cw(c97.545,12.219) 97.545,12.71 ; v1@97.195,68.564 cw(c97.545,68.219) 97.545,68.71 ; v1@97.2,12.42 cw(c97.057,12.277) 97.26,12.277 ; v1@97.2,68.42 cw(c97.057,68.277) 97.26,68.277 ; v1@97.24,38.41 ccw(c97.072,38.242) 97.072,38.48 ccw(c97.072,38.718) v1@97.24,38.55 ; v1@97.24,94.41 ccw(c97.072,94.242) 97.072,94.48 ccw(c97.072,94.718) v1@97.24,94.55 ; v1(97.25,13.94) 97.25,14.55 97.41,14.71 98.03,14.71 ; v1(97.25,69.94) 97.25,70.55 97.41,70.71 98.03,70.71 ; 97.26,12.228 cw(c97.532,12.228) v1@97.34,12.42 ; v1@97.26,12.49 97.26,11.59 97.11,11.44 95.11,11.44 ; v1@97.26,12.53 97.44,12.71 98.03,12.71 ccw(c98.03,11.742) v1@97.34,12.421 ; 97.26,68.228 cw(c97.532,68.228) v1@97.34,68.42 ; v1@97.26,68.49 97.26,67.59 97.11,67.44 95.11,67.44 ; v1@97.26,68.53 97.44,68.71 98.03,68.71 ccw(c98.03,67.742) v1@97.34,68.421 ; v1@97.366,12.512 cw(c97.545,12.555) 97.415,12.685 ; v1@97.366,68.512 cw(c97.545,68.555) 97.415,68.685 ; v1(97.43,17.94) 97.92,17.94 98.005,18.025 100.159,18.025 101.68,16.504 101.68,15.36 ; v1(97.43,73.94) 97.92,73.94 98.005,74.025 100.159,74.025 101.68,72.504 101.68,71.36 ; v1@97.5,17.87 cw(c97.668,17.702) 97.668,17.94 cw(c97.668,18.178) v1@97.5,18.01 ; v1@97.5,73.87 cw(c97.668,73.702) 97.668,73.94 cw(c97.668,74.178) v1@97.5,74.01 ; v1@97.9,45.21 cw(c97.732,45.042) 97.97,45.042 cw(c98.208,45.042) v1@98.04,45.21 ; v1@97.9,101.21 cw(c97.732,101.042) 97.97,101.042 cw(c98.208,101.042) v1@98.04,101.21 ; v1@97.96,10.79 ccw(c97.792,10.958) 98.03,10.958 ccw(c98.268,10.958) v1@98.1,10.79 ; v1@97.96,66.79 ccw(c97.792,66.958) 98.03,66.958 ccw(c98.268,66.958) v1@98.1,66.79 ; 97.97,41.29 98.59,41.29 98.75,41.45 v1(98.75,42.06) ; 97.97,42.79 99.18,42.79 99.55,43.16 ; 97.97,44.79 v1(97.97,45.28) ; 97.97,97.29 98.59,97.29 98.75,97.45 v1(98.75,98.06) ; 97.97,98.79 99.18,98.79 99.55,99.16 ; 97.97,100.79 v1(97.97,101.28) ; 98,23.63 98,20.94 99.68,19.26 100.648,19.26 103.52,16.388 103.52,14.42 103.31,14.21 102.83,14.21 ; 98,79.63 98,76.94 99.68,75.26 100.648,75.26 103.52,72.388 103.52,70.42 103.31,70.21 102.83,70.21 ; v1(98.03,10.72) 98.03,11.21 ; 98.03,13.21 96.82,13.21 96.45,12.84 ; v1(98.03,66.72) 98.03,67.21 ; 98.03,69.21 96.82,69.21 96.45,68.84 ; 98.455,43.29 ccw(c98.455,43.781) v1@98.805,43.436 ; 98.455,99.29 ccw(c98.455,99.781) v1@98.805,99.436 ; v1@98.5,37.99 ccw(c98.332,37.822) 98.332,38.06 ccw(c98.332,38.298) v1@98.5,38.13 ; v1@98.5,93.99 ccw(c98.332,93.822) 98.332,94.06 ccw(c98.332,94.298) v1@98.5,94.13 ; 98.585,43.315 ccw(c98.455,43.445) v1@98.634,43.488 ; 98.585,99.315 ccw(c98.455,99.445) v1@98.634,99.488 ; v1@98.66,99.579 cw(c97.97,100.258) 97.97,99.29 98.56,99.29 v1@98.74,99.47 ; v1@98.66,99.58 ccw(c98.468,99.772) 98.74,99.772 ; v1@98.68,41.99 cw(c98.512,41.822) 98.75,41.822 cw(c98.988,41.822) v1@98.82,41.99 ; v1@98.68,97.99 cw(c98.512,97.822) 98.75,97.822 cw(c98.988,97.822) v1@98.82,97.99 ; v1(98.69,17.52) 99.16,17.52 99.665,17.015 100.68,16 100.68,15.36 ; v1(98.69,73.52) 99.16,73.52 99.665,73.015 100.68,72 100.68,71.36 ; v1@98.74,43.47 98.56,43.29 97.97,43.29 ccw(c97.97,44.258) 98.66,43.579 ccw(c98.468,43.772) 98.74,43.772 ; v1@98.74,43.51 98.74,44.41 98.89,44.56 100.89,44.56 ; 98.74,43.723 ccw(c98.943,43.723) v1@98.8,43.58 ; v1@98.74,99.51 98.74,100.41 98.89,100.56 100.89,100.56 ; 98.74,99.723 ccw(c98.943,99.723) v1@98.8,99.58 ; v1@98.76,17.45 cw(c98.928,17.282) 98.928,17.52 cw(c98.928,17.758) v1@98.76,17.59 ; v1@98.76,73.45 cw(c98.928,73.282) 98.928,73.52 cw(c98.928,73.758) v1@98.76,73.59 ; 98.864,36.675 cw(c98.864,36.284) v1@99.14,36.56 ; 98.864,92.675 cw(c98.864,92.284) v1@99.14,92.56 ; 98.912,39.942 cw(c99.56,39.295) 99.56,40.211 ; 98.912,95.942 cw(c99.56,95.295) 99.56,96.211 ; 99.029,15.927 cw(c98.698,15.595) 99.167,15.595 ; 99.029,71.927 cw(c98.698,71.595) 99.167,71.595 ; 99.154,40.184 ccw(c98.847,40.49) 99.281,40.49 ; 99.154,96.184 ccw(c98.847,96.49) 99.281,96.49 ; 99.356,43.619 cw(c98.91,43.16) 99.55,43.16 ; 99.356,99.619 cw(c98.91,99.16) 99.55,99.16 ; 99.379,8.28 101.486,8.28 ; 99.379,64.28 101.486,64.28 ; 99.55,43.82 99.55,43.16 ; 99.55,99.82 99.55,99.16 ; 99.744,43.619 ccw(c100.19,43.16) 99.55,43.16 ; 99.744,99.619 ccw(c100.19,99.16) 99.55,99.16 ; v1@99.81,37.29 ccw(c99.642,37.122) 99.642,37.36 ccw(c99.642,37.598) v1@99.81,37.43 ; v1@99.81,93.29 ccw(c99.642,93.122) 99.642,93.36 ccw(c99.642,93.598) v1@99.81,93.43 ; v1(99.88,37.36) v1@99.81,37.36 ; v1(99.88,93.36) v1@99.81,93.36 ; v1@99.89,37.28 v1@99.81,37.36 ; v1@99.89,93.28 v1@99.81,93.36 ; v1@99.95,17.422 cw(c99.95,17.184) 100.118,17.352 cw(c100.286,17.52) v1@100.048,17.52 ; v1(99.95,17.52) 101.18,16.29 101.18,15.36 ; v1@99.95,73.422 cw(c99.95,73.184) 100.118,73.352 cw(c100.286,73.52) v1@100.048,73.52 ; v1(99.95,73.52) 101.18,72.29 101.18,71.36 ; 100.006,8.523 ccw(c100.593,9.111) 100.593,8.28 ; 100.006,64.523 ccw(c100.593,65.111) 100.593,64.28 ; 100.15,8.667 ccw(c101.084,9.602) 101.084,8.28 ; 100.15,64.667 ccw(c101.084,65.602) 101.084,64.28 ; 100.54,19.732 cw(c100.54,18.673) 101.288,19.422 ; 100.54,20.17 102.79,17.92 v1(103.45,17.92) ; 100.54,35.3 v1(103.31,38.07) ; 100.54,35.862 ccw(c100.54,37.219) 101.499,36.259 ; 100.54,36.065 ccw(c100.54,37.913) 101.846,36.606 ; 100.54,36.268 ccw(c100.54,38.606) 102.193,36.953 ; v1(100.54,36.86) 101.344,36.86 101.422,36.938 102.734,38.25 102.734,39.62 102.734,41.004 102.79,41.06 102.79,41.84 102.6,42.03 101.06,42.03 100.89,41.86 100.89,41.06 ; 100.54,75.732 cw(c100.54,74.673) 101.288,75.422 ; 100.54,76.17 102.79,73.92 v1(103.45,73.92) ; 100.54,91.3 v1(103.31,94.07) ; 100.54,91.862 ccw(c100.54,93.219) 101.499,92.259 ; 100.54,92.065 ccw(c100.54,93.913) 101.846,92.606 ; 100.54,92.268 ccw(c100.54,94.606) 102.193,92.953 ; v1(100.54,92.86) 101.344,92.86 101.422,92.938 102.734,94.25 102.734,95.62 102.734,97.004 102.79,97.06 102.79,97.84 102.6,98.03 101.06,98.03 100.89,97.86 100.89,97.06 ; v1@100.61,36.79 cw(c100.778,36.622) 100.778,36.86 cw(c100.778,37.098) v1@100.61,36.93 ; v1@100.61,92.79 cw(c100.778,92.622) 100.778,92.86 cw(c100.778,93.098) v1@100.61,92.93 ; 100.782,20.38 ccw(c101.873,20.38) 101.102,19.608 ; 100.782,76.38 ccw(c101.873,76.38) 101.102,75.608 ; 100.785,41.415 ccw(c100.532,41.668) 100.89,41.668 ccw(c101.248,41.668) 100.995,41.415 ; 100.785,44.215 ccw(c100.532,44.468) 100.89,44.468 ccw(c101.248,44.468) 100.995,44.215 ; 100.785,97.415 ccw(c100.532,97.668) 100.89,97.668 ccw(c101.248,97.668) 100.995,97.415 ; 100.785,100.215 ccw(c100.532,100.468) 100.89,100.468 ccw(c101.248,100.468) 100.995,100.215 ; 100.89,43.86 100.89,44.56 ; 100.89,44.484 cw(c101.557,44.484) 101.341,45.116 ; 100.89,44.769 cw(c101.46,44.769) 101.275,45.308 ; 100.89,45.054 cw(c101.362,45.054) 101.209,45.5 ; 100.89,99.86 100.89,100.56 ; 100.89,100.484 cw(c101.557,100.484) 101.341,101.116 ; 100.89,100.769 cw(c101.46,100.769) 101.275,101.308 ; 100.89,101.054 cw(c101.362,101.054) 101.209,101.5 ; 100.985,20.38 ccw(c102.567,20.38) 101.448,19.262 ; 100.985,76.38 ccw(c102.567,76.38) 101.448,75.262 ; v1@101.042,37.37 ccw(c100.804,37.37) 100.972,37.538 ccw(c101.14,37.706) v1@101.14,37.468 ; v1@101.042,93.37 ccw(c100.804,93.37) 100.972,93.538 ccw(c101.14,93.706) v1@101.14,93.468 ; 101.188,20.38 ccw(c103.261,20.38) 101.795,18.915 ; 101.188,35.62 cw(c101.981,35.62) 101.421,36.181 ; 101.188,76.38 ccw(c103.261,76.38) 101.795,74.915 ; 101.188,91.62 cw(c101.981,91.62) 101.421,92.181 ; 101.25,45.38 100.89,45.02 100.89,44.56 ; 101.25,101.38 100.89,101.02 100.89,100.56 ; 101.288,8.082 ccw(c100.811,7.605) 100.811,8.28 ccw(c100.811,8.955) 101.288,8.478 ; 101.288,64.082 ccw(c100.811,63.605) 100.811,64.28 ccw(c100.811,64.955) 101.288,64.478 ; 101.49,6.76 102.21,7.48 102.21,9.16 101.68,9.69 101.68,10.56 ; 101.49,7.039 ccw(c101.49,7.714) 101.967,7.237 ccw(c102.444,6.76) 101.769,6.76 ; 101.49,62.76 102.21,63.48 102.21,65.16 101.68,65.69 101.68,66.56 ; 101.49,63.039 ccw(c101.49,63.714) 101.967,63.237 ccw(c102.444,62.76) 101.769,62.76 ; 102.18,15.36 102.18,16.579 100.311,18.447 96.91,18.447 96.717,18.64 v1@96.19,18.64 ; 102.18,71.36 102.18,72.579 100.311,74.447 96.91,74.447 96.717,74.64 v1@96.19,74.64 ; 102.536,39.422 cw(c102.059,38.945) 102.734,38.945 cw(c103.409,38.945) 102.932,39.422 ; 102.536,39.818 ccw(c102.059,40.295) 102.734,40.295 ccw(c103.409,40.295) 102.932,39.818 ; 102.536,95.422 cw(c102.059,94.945) 102.734,94.945 cw(c103.409,94.945) 102.932,95.422 ; 102.536,95.818 ccw(c102.059,96.295) 102.734,96.295 ccw(c103.409,96.295) 102.932,95.818 ; 102.685,41.415 ccw(c102.432,41.668) 102.79,41.668 ccw(c103.148,41.668) 102.895,41.415 ; 102.685,97.415 ccw(c102.432,97.668) 102.79,97.668 ccw(c103.148,97.668) 102.895,97.415 ; 102.734,40.317 cw(c103.283,40.317) 102.895,40.705 ; 102.734,96.317 cw(c103.283,96.317) 102.895,96.705 ; 102.812,8.478 ccw(c102.335,8.955) 103.01,8.955 ccw(c103.685,8.955) 103.208,8.478 ; 102.812,64.478 ccw(c102.335,64.955) 103.01,64.955 ccw(c103.685,64.955) 103.208,64.478 ; 102.83,11.21 102.83,10.52 103.01,10.34 103.01,8.28 ; 102.83,12.21 v1(103.45,12.21) v1@103.52,12.21 ; 102.83,67.21 102.83,66.52 103.01,66.34 103.01,64.28 ; 102.83,68.21 v1(103.45,68.21) v1@103.52,68.21 ; v1@102.92,9.72 cw(c102.704,9.504) 103.01,9.504 ; v1@102.92,9.86 ccw(c102.704,10.076) 103.01,10.076 ; v1@102.92,65.72 cw(c102.704,65.504) 103.01,65.504 ; v1@102.92,65.86 ccw(c102.704,66.076) 103.01,66.076 ; v1@103.212,38.07 cw(c102.974,38.07) 103.142,37.902 cw(c103.31,37.734) v1@103.31,37.972 ; v1@103.212,94.07 cw(c102.974,94.07) 103.142,93.902 cw(c103.31,93.734) v1@103.31,93.972 ; v1@103.38,12.14 ccw(c103.212,11.972) 103.212,12.21 ccw(c103.212,12.448) v1@103.38,12.28 ; v1@103.38,17.85 ccw(c103.212,17.682) 103.212,17.92 ccw(c103.212,18.158) v1@103.38,17.99 ; v1@103.38,68.14 ccw(c103.212,67.972) 103.212,68.21 ccw(c103.212,68.448) v1@103.38,68.28 ; v1@103.38,73.85 ccw(c103.212,73.682) 103.212,73.92 ccw(c103.212,74.158) v1@103.38,73.99 ; v1@104.48,43.79 v1(104.55,43.79) 105.17,43.79 ; v1@104.48,99.79 v1(104.55,99.79) 105.17,99.79 ; v1(104.55,38.08) 105.21,38.08 107.46,35.83 ; v1(104.55,94.08) 105.21,94.08 107.46,91.83 ; v1@104.62,38.01 cw(c104.788,37.842) 104.788,38.08 cw(c104.788,38.318) v1@104.62,38.15 ; v1@104.62,43.72 cw(c104.788,43.552) 104.788,43.79 cw(c104.788,44.028) v1@104.62,43.86 ; v1@104.62,94.01 cw(c104.788,93.842) 104.788,94.08 cw(c104.788,94.318) v1@104.62,94.15 ; v1@104.62,99.72 cw(c104.788,99.552) 104.788,99.79 cw(c104.788,100.028) v1@104.62,99.86 ; v1(104.69,17.93) 107.46,20.7 ; v1@104.69,18.028 ccw(c104.69,18.266) 104.858,18.098 ccw(c105.026,17.93) v1@104.788,17.93 ; v1(104.69,73.93) 107.46,76.7 ; v1@104.69,74.028 ccw(c104.69,74.266) 104.858,74.098 ccw(c105.026,73.93) v1@104.788,73.93 ; 104.792,47.522 cw(c104.315,47.045) 104.99,47.045 cw(c105.665,47.045) 105.188,47.522 ; 104.792,103.522 cw(c104.315,103.045) 104.99,103.045 cw(c105.665,103.045) 105.188,103.522 ; 104.99,45.924 cw(c105.296,45.924) v1@105.08,46.14 ; 104.99,46.496 ccw(c105.296,46.496) v1@105.08,46.28 ; 104.99,47.72 104.99,45.66 105.17,45.48 105.17,44.79 ; 104.99,101.924 cw(c105.296,101.924) v1@105.08,102.14 ; 104.99,102.496 ccw(c105.296,102.496) v1@105.08,102.28 ; 104.99,103.72 104.99,101.66 105.17,101.48 105.17,100.79 ; 105.068,16.182 cw(c104.591,15.705) 105.266,15.705 cw(c105.941,15.705) 105.464,16.182 ; 105.068,16.578 ccw(c104.591,17.055) 105.266,17.055 ccw(c105.941,17.055) 105.464,16.578 ; 105.068,72.182 cw(c104.591,71.705) 105.266,71.705 cw(c105.941,71.705) 105.464,72.182 ; 105.068,72.578 ccw(c104.591,73.055) 105.266,73.055 ccw(c105.941,73.055) 105.464,72.578 ; 105.105,14.585 cw(c104.852,14.332) 105.21,14.332 cw(c105.568,14.332) 105.315,14.585 ; 105.105,15.295 ccw(c104.717,15.683) 105.266,15.683 ; 105.105,70.585 cw(c104.852,70.332) 105.21,70.332 cw(c105.568,70.332) 105.315,70.585 ; 105.105,71.295 ccw(c104.717,71.683) 105.266,71.683 ; 105.17,41.29 105.17,39.497 107.52,37.146 108.488,37.146 108.96,36.675 111.165,36.675 v1(111.21,36.63) ; 105.17,41.79 104.69,41.79 104.48,41.58 104.48,39.612 107.352,36.74 108.32,36.74 110,35.06 110,32.37 ; 105.17,97.29 105.17,95.497 107.52,93.146 108.488,93.146 108.96,92.675 111.165,92.675 v1(111.21,92.63) ; 105.17,97.79 104.69,97.79 104.48,97.58 104.48,95.612 107.352,92.74 108.32,92.74 110,91.06 110,88.37 ; 105.807,75.047 cw(c107.46,73.394) 107.46,75.732 ; 105.807,19.047 cw(c107.46,17.394) 107.46,19.732 ; 105.82,40.64 105.82,39.421 107.689,37.553 111.09,37.553 111.283,37.36 v1@111.81,37.36 ; 105.82,96.64 105.82,95.421 107.689,93.553 111.09,93.553 111.283,93.36 v1@111.81,93.36 ; 106.154,19.394 cw(c107.46,18.087) 107.46,19.935 ; 106.154,75.394 cw(c107.46,74.087) 107.46,75.935 ; 106.205,37.085 cw(c104.739,35.62) 106.812,35.62 ; 106.205,93.085 cw(c104.739,91.62) 106.812,91.62 ; 106.231,49.24 cw(c105.556,49.24) 106.033,48.763 cw(c106.51,48.286) 106.51,48.961 ; 106.231,105.24 cw(c105.556,105.24) 106.033,104.763 cw(c106.51,104.286) 106.51,104.961 ; 106.32,40.64 106.32,39.496 107.841,37.975 109.995,37.975 110.08,38.06 v1(110.57,38.06) ; 106.32,45.44 106.32,46.31 105.79,46.84 105.79,48.52 106.51,49.24 ; 106.32,96.64 106.32,95.496 107.841,93.975 109.995,93.975 110.08,94.06 v1(110.57,94.06) ; 106.32,101.44 106.32,102.31 105.79,102.84 105.79,104.52 106.51,105.24 ; 106.501,19.741 cw(c107.46,18.781) 107.46,20.138 ; 106.501,75.741 cw(c107.46,74.781) 107.46,76.138 ; 106.514,47.72 108.62,47.72 ; 106.514,103.72 108.62,103.72 ; 106.552,36.738 cw(c105.433,35.62) 107.015,35.62 ; 106.551,92.738 cw(c105.433,91.62) 107.015,91.62 ; 106.579,19.819 ccw(c106.019,20.38) 106.812,20.38 ; 106.579,75.819 ccw(c106.019,76.38) 106.812,76.38 ; 106.659,10.884 ccw(c106.443,11.516) 107.11,11.516 ; 106.659,66.884 ccw(c106.443,67.516) 107.11,67.516 ; 106.712,36.578 ccw(c107.46,37.327) 107.46,36.268 ; 106.712,47.522 cw(c107.189,47.045) 107.189,47.72 cw(c107.189,48.395) 106.712,47.918 ; 106.712,92.578 ccw(c107.46,93.327) 107.46,92.268 ; 106.712,103.522 cw(c107.189,103.045) 107.189,103.72 cw(c107.189,104.395) 106.712,103.918 ; 106.725,10.692 ccw(c106.54,11.231) 107.11,11.231 ; 106.725,66.692 ccw(c106.54,67.231) 107.11,67.231 ; 106.75,10.62 107.11,10.98 107.11,11.44 ; 106.75,66.62 107.11,66.98 107.11,67.44 ; 106.791,10.5 ccw(c106.638,10.946) 107.11,10.946 ; 106.791,66.5 ccw(c106.638,66.946) 107.11,66.946 ; 106.82,40.64 106.82,39.71 v1(108.05,38.48) ; 106.82,96.64 106.82,95.71 v1(108.05,94.48) ; v1@106.86,18.532 cw(c106.86,18.294) 107.028,18.462 cw(c107.196,18.63) v1@106.958,18.63 ; v1(106.86,18.63) 108.07,17.42 110.076,17.42 110.481,17.015 111.09,17.015 112.18,15.925 112.18,15.36 ; v1@106.86,74.532 cw(c106.86,74.294) 107.028,74.462 cw(c107.196,74.63) v1@106.958,74.63 ; v1(106.86,74.63) 108.07,73.42 110.076,73.42 110.481,73.015 111.09,73.015 112.18,71.925 112.18,71.36 ; 106.898,36.392 cw(c106.127,35.62) 107.218,35.62 ; 106.898,92.392 cw(c106.127,91.62) 107.218,91.62 ; 106.916,47.72 cw(c106.916,46.398) 107.85,47.333 ; 106.916,103.72 cw(c106.916,102.398) 107.85,103.333 ; 107.005,11.785 cw(c106.752,11.532) 107.11,11.532 cw(c107.468,11.532) 107.215,11.785 ; 107.005,14.585 cw(c106.752,14.332) 107.11,14.332 cw(c107.468,14.332) 107.215,14.585 ; 107.005,67.785 cw(c106.752,67.532) 107.11,67.532 cw(c107.468,67.532) 107.215,67.785 ; 107.005,70.585 cw(c106.752,70.332) 107.11,70.332 cw(c107.468,70.332) 107.215,70.585 ; 107.11,12.14 107.11,11.44 ; 107.11,14.94 107.11,14.14 106.94,13.97 105.4,13.97 105.21,14.16 105.21,14.94 105.266,14.996 105.266,16.38 105.266,17.75 106.578,19.062 106.656,19.14 v1(107.46,19.14) ; 107.11,68.14 107.11,67.44 ; 107.11,70.94 107.11,70.14 106.94,69.97 105.4,69.97 105.21,70.16 105.21,70.94 105.266,70.996 105.266,72.38 105.266,73.75 106.578,75.062 106.656,75.14 v1(107.46,75.14) ; 107.32,40.64 107.32,40 108.335,38.985 108.84,38.48 v1(109.31,38.48) ; 107.32,96.64 107.32,96 108.335,94.985 108.84,94.48 v1(109.31,94.48) ; v1@107.39,19.07 ccw(c107.222,18.902) 107.222,19.14 ccw(c107.222,19.378) v1@107.39,19.21 ; v1@107.39,75.07 ccw(c107.222,74.902) 107.222,75.14 ccw(c107.222,75.378) v1@107.39,75.21 ; 107.407,47.72 cw(c107.407,46.889) 107.994,47.477 ; 107.407,103.72 cw(c107.407,102.889) 107.994,103.477 ; 107.82,40.64 107.82,40.075 108.91,38.985 109.519,38.985 109.924,38.58 111.93,38.58 v1(113.14,37.37) ; 107.82,96.64 107.82,96.075 108.91,94.985 109.519,94.985 109.924,94.58 111.93,94.58 v1(113.14,93.37) ; v1@107.952,38.48 ccw(c107.714,38.48) 107.882,38.648 ccw(c108.05,38.816) v1@108.05,38.578 ; v1@107.952,94.48 ccw(c107.714,94.48) 107.882,94.648 ccw(c108.05,94.816) v1@108.05,94.578 ; v1@108.11,18.72 v1@108.19,18.64 ; v1@108.11,74.72 v1@108.19,74.64 ; v1(108.12,18.64) v1@108.19,18.64 ; v1(108.12,74.64) v1@108.19,74.64 ; v1@108.19,18.57 cw(c108.358,18.402) 108.358,18.64 cw(c108.358,18.878) v1@108.19,18.71 ; v1@108.19,74.57 cw(c108.358,74.402) 108.358,74.64 cw(c108.358,74.878) v1@108.19,74.71